# Altium PCB opo_v3.0.PcbDoc (part 2 of 2)
Units mil, origin at the board's own origin, x right, y up, seen from the top; angles counter-clockwise.
Board outline 2047.24 x 1889.76 mil, 2 copper layers (Top Layer, Bottom Layer), stack 61.4 mil thick; 103 components, 79 nets, 432 pads, 140 vias.
Unrouted connection lines stored in the file: 108.
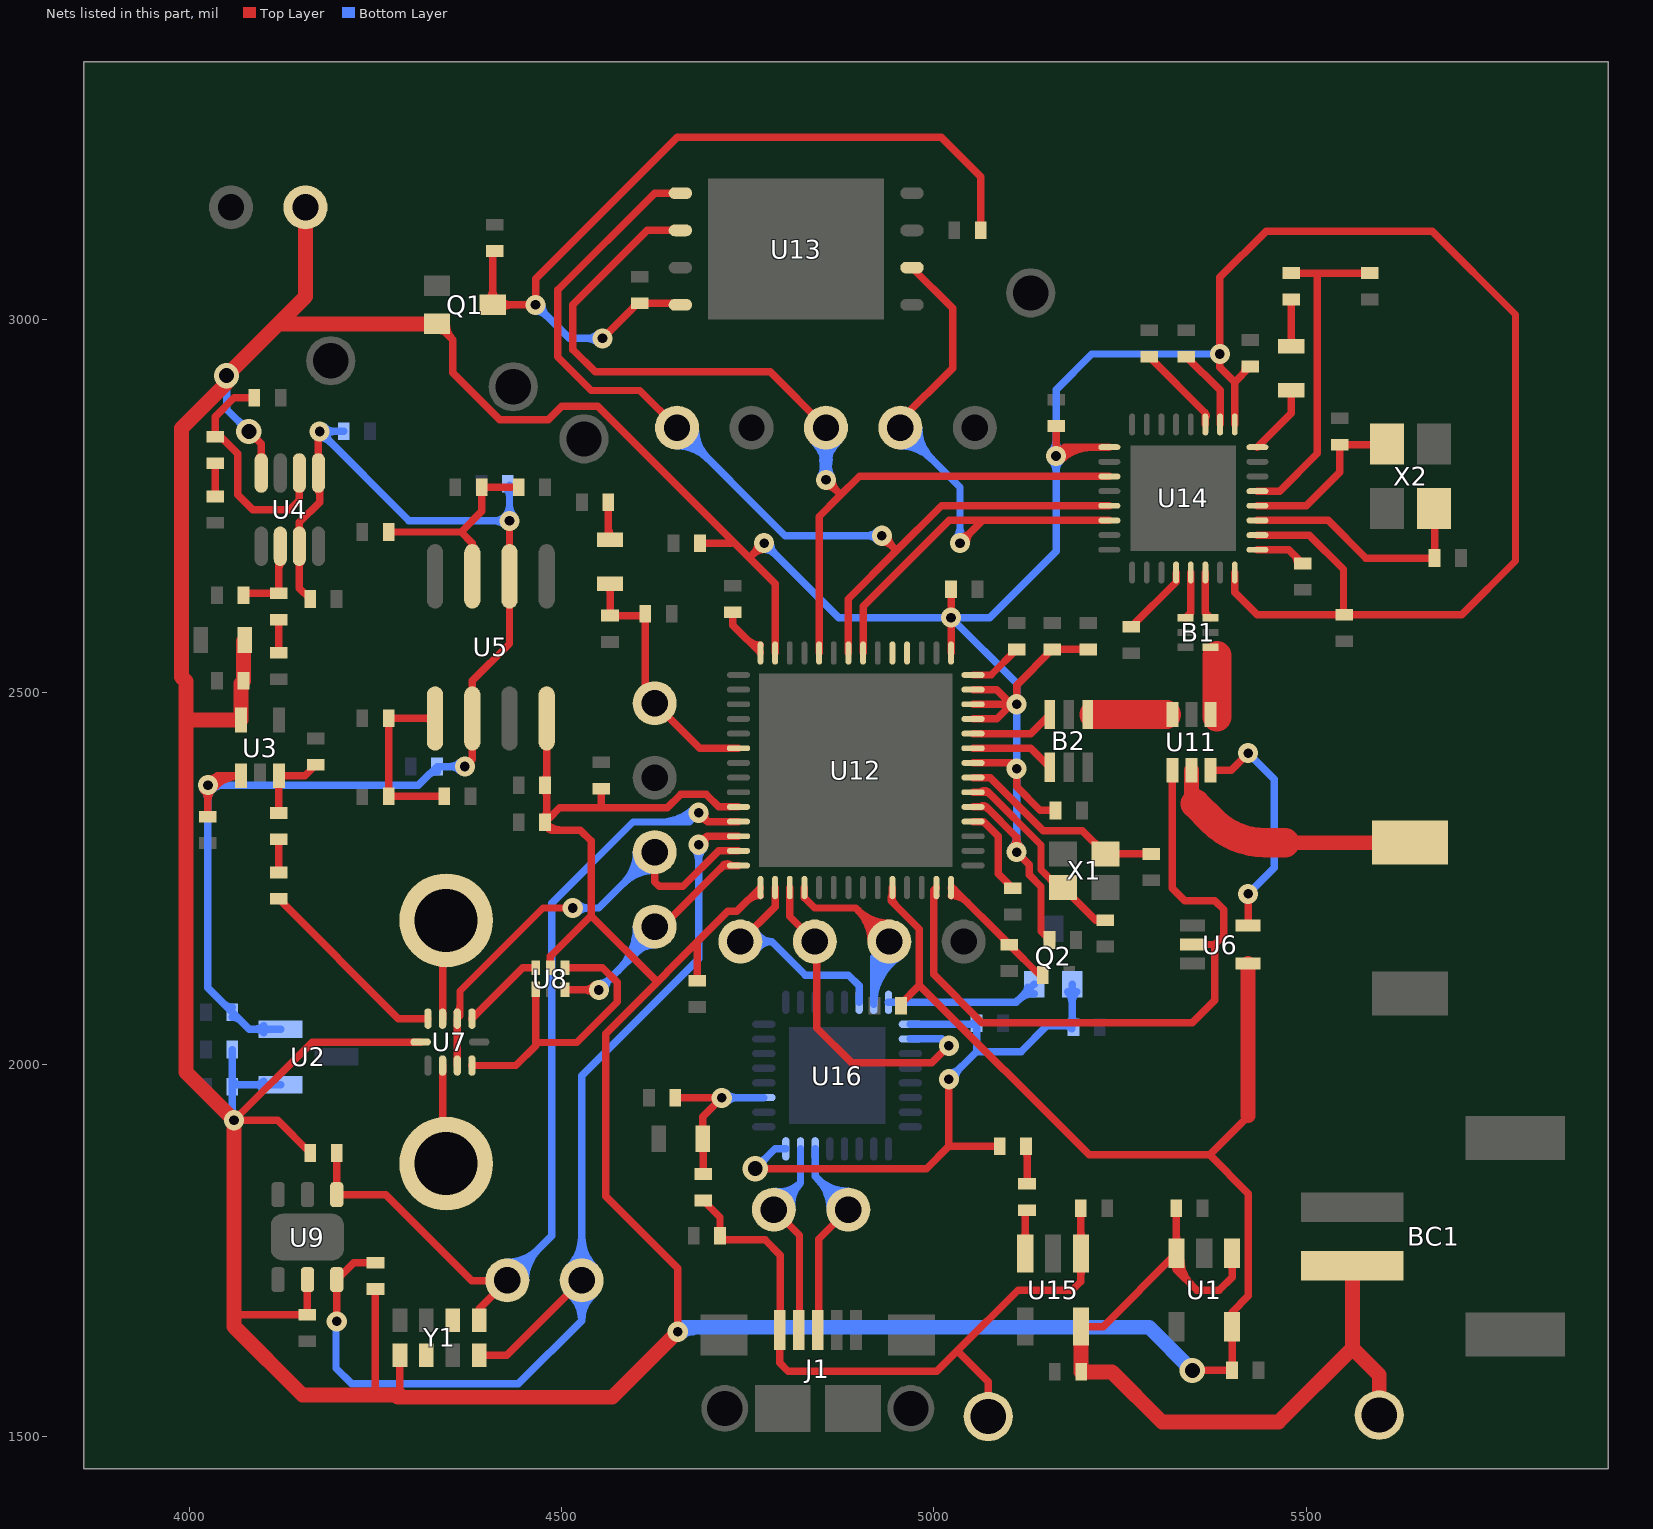
[diagram p2: the nets of this part, all layers, seen from the top]

## Via types
v1: diameter 27, hole 13, Top Layer to Bottom Layer, tented both sides, 110 vias
v2: diameter 34, hole 20, Top Layer to Bottom Layer, tented both sides, 26 vias
v3: diameter 29, hole 15, Top Layer to Bottom Layer, tented both sides, 3 vias
v4: diameter 30, hole 15.75, Top Layer to Bottom Layer, tented both sides, 1 vias

## Nets (pads, with @x,y where several pads share a name; then routed paths per layer and width w, separated by ;. In a path a pad name is that pad's centre, name@x,y a point inside that pad or via, vN(x,y) a via of type N, cw(c..) or ccw(c..) an arc to the next point about the centre after c; other vN are vias at no path point) (continued)
I2C_SCL: pad.1@4527,1710 R16.2 U9.6 U12.12 Y1.8 | length 1825
  Top Layer w10: v1(4198,1655) U9.6@4198,1710.91 4220.8,1733.72 R16.2@4250,1733.72 ; Y1.8@4389.15,1609.38 4426.38,1609.38 pad.1@4527,1710 ; v1(4684,2295) 4695.42,2306.42 ; v1@4685.55,2303.36 ccw(c4687.58,2314.26) 4695.42,2306.42 ; v1@4692.36,2296.55 cw(c4703.26,2298.58) 4695.42,2306.42 ; U12.12@4737.52,2306.42 4695.42,2306.42
  Bottom Layer w10: v1@4197,1654 4197,1592 4218,1571 4442,1571 4527,1656 ; pad.1@4509.66,1727.34 ccw(c4467.79,1769.21) 4527,1769.21 ccw(c4586.21,1769.21) pad.1@4544.34,1727.34 ; pad.1@4510.86,1691.53 cw(c4479.82,1656) 4527,1656 ; pad.1@4516.73,1720.27 ccw(c4491.93,1745.07) 4527,1745.07 ccw(c4562.07,1745.07) pad.1@4537.27,1720.27 ; pad.1@4517.44,1699.06 cw(c4499.06,1678.02) 4527,1678.02 cw(c4554.94,1678.02) pad.1@4536.56,1699.06 ; pad.1@4543.14,1691.53 ccw(c4574.18,1656) 4527,1656 ; v1@4677.99,2288.99 cw(c4663.48,2274.48) 4684,2274.48 cw(c4704.52,2274.48) v1@4690.01,2288.99 ; v1(4684,2295) 4684,2142 4527,1985 pad.1@4527,1710 4527,1656
I2C_SDA: pad.0@4427,1710 R15.2 U9.1 U12.11 Y1.1 | length 1490
  Top Layer w10: R15.2@4198,1881 U9.1@4198,1825.09 4263.91,1825.09 4379.53,1709.47 4427,1709.47 4389.15,1671.62 Y1.1@4389.15,1656.62 ; v1(4684,2338) 4695.9,2326.1 ; v1@4685.27,2329.6 cw(c4687.13,2317.33) 4695.9,2326.1 ; v1@4692.4,2336.73 ccw(c4704.67,2334.87) 4695.9,2326.1 ; U12.11@4737.52,2326.1 4695.9,2326.1
  Bottom Layer w10: pad.0@4427,1710 4487,1770 4487,2216.65 4595.88,2325.53 4671.53,2325.53 v1(4684,2338) ; pad.0@4427,1724.53 ccw(c4427,1759.6) 4451.8,1734.8 ccw(c4476.6,1710) pad.0@4441.53,1710 ; pad.0@4427,1734.53 ccw(c4427,1793.74) 4468.87,1751.87 ccw(c4510.74,1710) pad.0@4451.53,1710 ; 4633.37,2325.53 ccw(c4633.37,2388.63) v1@4677.99,2344.01 ; 4657.51,2325.53 ccw(c4657.51,2364.49) v1@4685.06,2336.94
INTEGRATOR: C17.1 D1.2 pad.11 R11.1 U12.6 | length 378.8
  Top Layer w10: D1.2@4561.58,2642.05 cw(c4553.31,2633.78) 4565,2633.78 cw(c4576.69,2633.78) D1.2@4568.42,2642.05 ; D1.2@4565,2645.47 R11.1@4565,2602.72 C17.1@4610,2602.72 ; 4601.35,2602.72 cw(c4601.35,2590.13) C17.1@4610.25,2599.03 ; C17.1@4612.28,2605 4612.28,2497.72 pad.11@4625,2485 4685.47,2424.53 U12.6@4737.52,2424.53
NetANT1_1: ANT1.1 U11.5 | length 352.3
  Top Layer w19.68: U11.5@5345.83,2395 5345.83,2362.3 ccw(c5363.22,2362.3) 5350.91,2350.01 ; 5471.31,2297.69 ANT1.1@5639.45,2297.69
  Top Layer w39.37: 5350.92,2350 5373.94,2326.98 ccw(c5444.65,2397.69) 5444.65,2297.69 5471.31,2297.69
NetB1_1: B1.1 U11.1 | length 82
  Top Layer w39.37: 5380,2467 5380,2549
NetB1_3: B1.3 U14.22 | length 63.8
  Top Layer w10: U14.22@5364.53,2660.59 5364.53,2606.57 B1.3@5371.42,2599.68
NetB1_4: B1.4 U14.21 | length 63.8
  Top Layer w10: B1.4@5337.95,2599.68 5344.84,2606.57 U14.21@5344.84,2660.59
NetB2_1: B2.1 U11.3 | length 97
  Top Layer w39.37: 5215,2469.8 5312,2469.8
NetB2_3: B2.3 U12.38 | length 113.5
  Top Layer w10: U12.38@5052.48,2444.21 5129.82,2444.21 B2.3@5155.41,2469.8
NetB2_4: B2.4 U12.37 | length 113.5
  Top Layer w10: U12.37@5052.48,2424.53 5129.82,2424.53 B2.4@5155.41,2398.94
NetC6_2: C6.2 R2.1 | length 44.6
  Top Layer w10: C6.2@4035,2762.72 R2.1@4035,2807.28
NetC7_1: C7.1 U7.4 | length 267.1
  Top Layer w10: C7.1@4120,2222.28 4280.79,2061.5 U7.4@4320.47,2061.5
NetC7_2: C7.2 R4.1 | length 44.6
  Top Layer w10: C7.2@4120,2257.72 R4.1@4120,2302.28
NetC8_2: C8.2 R6.1 | length 44.6
  Top Layer w10: C8.2@4120,2552.72 R6.1@4120,2597.28
NetC22_1: C22.1 U12.56 | length 86.9
  Top Layer w10: C22.1@4730,2602.28 4730,2589.53 U12.56@4767.05,2552.48 ; 4748.7,2570.83 ccw(c4767.05,2589.18) U12.56@4767.05,2563.23 ; U12.56@4765.77,2553.76 ccw(c4767.05,2555.03) U12.56@4767.05,2553.23
NetC23_1: C23.1 U12.35 X1.1 | length 282
  Top Layer w10: U12.35@5052.48,2385.16 5075.84,2385.16 5147,2314 5199.18,2314 X1.1@5230.54,2282.64 C23.1@5292,2282.64
NetC24_1: C24.1 U12.32 | length 120.1
  Top Layer w10: U12.32@5052.48,2326.1 5067.02,2326.1 5086.5,2306.62 5086.5,2256.22 C24.1@5106,2236.72
NetC25_2: C25.2 U12.34 X1.3 | length 292.5
  Top Layer w10: U12.34@5052.48,2365.47 5072.9,2365.47 ; U12.34@5063.7,2366.35 cw(c5067.76,2360.34) 5072.9,2365.47 ; U12.34@5064.29,2366.54 cw(c5064.29,2348.32) 5077.17,2361.2 ; C25.2@5230,2193.72 5217.1,2193.72 X1.3@5173.46,2237.36 5167.74,2237.36 5143.76,2261.35 5143.76,2294.62 5072.9,2365.47
NetC26_1: C26.1 R18.1 U12.28 | length 201.1
  Top Layer w10: U12.28@5022.95,2226.77 cw(c5022.95,2196.38) 5044.45,2217.87 ; U12.28@5022.95,2236.77 cw(c5022.95,2230.52) 5027.37,2234.94 ; U12.28@5022.95,2237.52 5024.79,2237.52 5101,2161.31 R18.1@5101,2160.72 5141.72,2120 C26.1@5146.28,2120
NetC27_1: C27.1 U14.28 X2.1 | length 230.4
  Top Layer w10: U14.28@5434.41,2750.16 5500.16,2750.16 5545,2795 C27.1@5545,2832.28 5607.48,2832.28 X2.1@5608.5,2833.31
NetC28_1: C28.1 L1.1 U14.29 | length 448.9
  Top Layer w10: U14.29@5434.41,2769.84 5464.49,2769.84 5515,2820.35 5515,3062.72 ; L1.1@5480,3062.72 5515,3062.72 ; C28.1@5585,3062.72 5515,3062.72
NetC29_2: C29.2 U14.27 X2.3 | length 325.8
  Top Layer w10: U14.27@5434.41,2730.47 5529.53,2730.47 5580,2680 C29.2@5672.28,2680 5672.28,2745.91 X2.3@5671.5,2746.69
NetC32_1: C32.1 U14.2 | length 109.6
  Top Layer w10: C32.1@5339,2950.28 5384.21,2905.07 U14.2@5384.21,2859.41
NetC33_1: C33.1 U14.3 | length 128.7
  Top Layer w10: C33.1@5289,2950.28 5364.53,2874.76 U14.3@5364.53,2859.41 ; 5363.15,2876.14 cw(c5357.24,2870.24) U14.3@5365.59,2870.24
NetC34_1: C34.1 U14.20 | length 97.8
  Top Layer w10: C34.1@5265,2587.72 5325.16,2647.87 U14.20@5325.16,2660.59
NetD1_1: D1.1 R9.2 | length 63.5
  Top Layer w10: D1.1@4562.72,2706.81 R9.2@4562.72,2755 ; 4562.72,2721.73 ccw(c4582.2,2721.73) D1.1@4568.42,2707.95
NetD2_2: D2.2 R20.1 | length 57.9
  Top Layer w10: D2.2@5121.68,1884.03 cw(c5113.68,1876.03) 5125,1876.03 ; R20.1@5125,1839.72 D2.2@5125,1888.72
NetJ1_2: J1.2 pad.7@4785,1805 U16.15 | length 364.5
  Top Layer w10: pad.7@4785,1805 4819.41,1770.59 J1.2@4819.41,1666
  Bottom Layer w10: pad.7@4785,1805 4820.79,1840.79 ; pad.7@4786.7,1819.43 ccw(c4789.46,1842.93) 4806.2,1826.2 ccw(c4822.93,1809.46) pad.7@4799.43,1806.7 ; pad.7@4787.87,1829.36 ccw(c4792.54,1869.03) 4820.79,1840.79 ; pad.7@4809.36,1807.87 cw(c4849.03,1812.54) 4820.79,1840.79 ; U16.15@4820.79,1886.57 4820.79,1840.79
NetJ1_3: J1.3 pad.6@4885,1805 U16.14 | length 403.7
  Top Layer w10: J1.3@4845,1666 4845,1765 pad.6@4885,1805
  Bottom Layer w10: U16.14@4840.47,1886.57 4840.47,1849.53 pad.6@4885,1805 ; pad.6@4860.47,1805 ccw(c4801.26,1805) 4843.13,1846.87 ccw(c4885,1888.74) pad.6@4885,1829.53 ; pad.6@4870.47,1805 ccw(c4835.4,1805) 4860.2,1829.8 ccw(c4885,1854.6) pad.6@4885,1819.53
NetL1_2: L1.2 L2.1 | length 81.1
  Top Layer w10: L2.1@5476.58,2967.95 ccw(c5468.31,2976.22) 5480,2976.22 ccw(c5491.69,2976.22) L2.1@5483.42,2967.95 ; L2.1@5480,2964.53 L1.2@5480,3027.28
NetL2_2: L2.2 U14.32 | length 83.8
  Top Layer w10: U14.32@5434.41,2828.9 5480,2874.49 5480,2893.78
NetR1_1: R1.1 R4.2 U3.3 | length 112.7
  Top Layer w10: R4.2@4120,2337.72 4120,2387.01 U3.3@4120.59,2387.6 4155.31,2387.6 R1.1@4170,2402.28 ; 4120,2370.38 cw(c4128.95,2370.38) U3.3@4122.62,2376.71
NetR2_2: R2.2 R5.2 U4.6 | length 324.5
  Top Layer w10: R2.2@4035,2842.72 4035,2870 4060,2895 R5.2@4087.28,2895 ; R2.2@4042.28,2842.72 4065,2820 4065,2765 4085,2745 4135,2745 4147.8,2757.8 U4.6@4147.8,2794.21 ; U4.6@4145.07,2773.77 cw(c4138.48,2767.18) 4147.8,2767.18 cw(c4157.11,2767.18) U4.6@4150.52,2773.77
NetR3_2: R3.2 R6.2 U4.2 | length 134.3
  Top Layer w10: R3.2@4072.72,2630 4075.43,2632.72 R6.2@4120,2632.72 4120,2693.58 U4.2@4122.2,2695.79 ; R3.2@4074.75,2635.97 ccw(c4082.6,2643.82) 4082.6,2632.72 ; 4120,2663.43 cw(c4136.84,2663.43) U4.2@4124.93,2675.34
NetR7_1: R7.1 R8.2 R10.1 U5.3 | length 301.3
  Top Layer w10: R8.2@4267.72,2715 4365,2715 ; U5.3@4376.38,2692.52 ccw(c4370.46,2700) 4380,2700 ; U5.3@4380,2655.47 4380,2700 ; U5.3@4383.62,2692.52 cw(c4389.54,2700) 4380,2700 ; R7.1@4442.28,2775 R10.1@4392.72,2775 4392.72,2742.72 4365,2715 ; 4365,2715 4380,2700
NetR12_2: R12.2 R13.1 R14.1 U5.5 | length 263.5
  Top Layer w10: 4314.79,2465 cw(c4314.79,2449.32) U5.5@4325.88,2460.41 ; 4317.07,2465 ccw(c4317.07,2477.45) U5.5@4325.88,2468.65 ; U5.5@4329.53,2465 R12.2@4267.72,2465 R13.1@4267.72,2360 R14.1@4342.28,2360
NetR17_1: R17.1 U12.42 | length 72.7
  Top Layer w10: U12.42@5052.48,2522.95 5076.67,2522.95 R17.1@5111,2557.28
NetR19_1: R19.1 U14.25 | length 81.1
  Top Layer w10: U14.25@5434.41,2691.1 5476.61,2691.1 R19.1@5495,2672.72 ; 5483.37,2684.34 cw(c5471.75,2672.72) R19.1@5488.19,2672.72
NetR20_2: R20.2 U15.3 | length 87.3
  Top Layer w10: U15.3@5118.48,1765.1 ccw(c5108.53,1775.04) 5122.6,1775.04 ccw(c5136.67,1775.04) U15.3@5126.72,1765.1 ; R20.2@5119.03,1802.25 cw(c5110.42,1793.64) 5122.6,1793.64 ; U15.3@5122.6,1746.21 R20.2@5122.6,1801.88
NetU7_3: U7.3 UT1.2 | length 127
  Top Layer w10: U7.3@4340.16,2061.5 UT1.2@4340.16,2188.54
NetU7_7: U7.7 UT1.1 | length 127
  Top Layer w10: UT1.1@4340.16,1871.46 U7.7@4340.16,1998.5
NetU12_46: U12.46
NetU12_47: U12.47
PWM: pad.9 U8.3 U12.14 | length 530.7
  Top Layer w10: U8.3@4504.69,2100.24 v1@4549.76,2100.24 ; 4528.91,2100.24 cw(c4528.91,2078.91) v1@4543.99,2093.99 ; 4530.05,2100.24 ccw(c4530.05,2119.95) v1@4543.99,2106.01 ; pad.9@4625,2189.53 pad.9@4625,2185 4635,2185 4717.05,2267.05 ; 4712.74,2262.74 cw(c4725.71,2249.77) U12.14@4725.71,2268.11 ; U12.14@4726.31,2267.93 ccw(c4722.21,2261.89) 4717.05,2267.05 ; U12.14@4737.52,2267.05 4717.05,2267.05
  Bottom Layer w10: v1(4550,2100) pad.9@4625,2175 ; v1@4550,2108.5 ccw(c4550,2129.02) 4564.51,2114.51 ccw(c4579.02,2100) v1@4558.5,2100 ; 4576.06,2126.06 ccw(c4517.12,2185) pad.9@4600.47,2185 ; 4593.13,2143.13 ccw(c4551.26,2185) pad.9@4610.47,2185 ; 4600.2,2150.2 cw(c4625,2125.4) pad.9@4625,2160.47
RF_SWITCH_1: U6.5 U11.6 | length 320.5
  Top Layer w10: U11.6@5371.42,2395 5399,2395 v1(5422,2418) ; U6.5@5422,2186.59 v1(5422,2229)
  Bottom Layer w10: v1(5422,2229) 5457,2264 5457,2383 v1(5422,2418)
RF_SWITCH_2: U6.2 U11.4 U12.27 | length 938.9
  Top Layer w10: 4999.47,2219.11 cw(c5009.86,2219.11) U12.27@5002.52,2226.46 ; U12.27@5003.27,2237.52 4999.47,2233.72 4999.47,2120.88 5064.35,2056 5347,2056 5377,2086 5377,2161 ; U11.4@5320.24,2395 5320.24,2236.76 5337,2220 5377,2220 5389,2208 5389,2173 5377,2161 ; U6.2@5347.2,2161 5377,2161
ROM_CONTROL: pad.5@4940,2165 U12.18 U16.31 | length 619.1
  Top Layer w10: U12.18@4826.1,2237.52 4826.1,2223.9 4840,2210 4895,2210 pad.5@4940,2165 ; pad.5@4915.47,2165 ccw(c4856.26,2165) 4898.13,2206.87 ccw(c4940,2248.74) pad.5@4940,2189.53 ; pad.5@4925.47,2165 ccw(c4890.4,2165) 4915.2,2189.8 ccw(c4940,2214.6) pad.5@4940,2179.53
  Bottom Layer w10: U16.31@4919.21,2080.82 cw(c4995.53,2080.82) pad.5@4953.51,2144.53 ; U16.31@4919.21,2083.43 4919.21,2144.21 pad.5@4940,2165 ; 4919.21,2099.4 cw(c4983.27,2099.4) pad.5@4948,2152.87 ; 4919.21,2117.97 cw(c4971.02,2117.97) pad.5@4942.49,2161.22 ; 4919.21,2136.55 cw(c4958.77,2136.55) pad.5@4936.99,2169.57
ROM_RESET: Q2.2 U16.32 | length 238.8
  Bottom Layer w10: U16.32@4938.9,2083.43 5110.24,2083.43 Q2.2@5134.41,2107.6 ; 5112.7,2085.89 cw(c5134.41,2064.18) Q2.2@5134.41,2094.88 ; Q2.2@5122.21,2095.39 ccw(c5113.94,2103.66) Q2.2@5125.63,2103.66
ROM_UART_RXD: pad.3 U12.16 U16.30 | length 348.2
  Top Layer w10: pad.3@4740,2165 4786.73,2211.73 U12.16@4786.73,2237.52
  Bottom Layer w10: pad.3@4740,2165 4782,2165 ; pad.3@4761.36,2152.95 cw(c4782,2141.31) 4782,2165 ; pad.3@4761.36,2177.05 ccw(c4782,2188.69) 4782,2165 ; U16.30@4899.53,2083.43 4899.53,2105.47 4885,2120 4827,2120 4782,2165
ROM_UART_TXD: pad.4@4840,2165 U12.17 U16.2 | length 465.2
  Top Layer w10: U12.17@4806.42,2237.52 4806.42,2198.58 pad.4@4840,2165 4842.83,2162.17 4842.83,2048.94 4889.77,2002 4997,2002 v1(5020,2025)
  Bottom Layer w10: U16.2@4968.43,2034.21 5010.79,2034.21 v1(5020,2025)
RTC_CLKOUT: Y1.2
RTC_INT: Y1.6
SPI_MISO: pad.7@4955,2855 U12.49 U13.2 U14.14 | length 1151.2
  Top Layer w10: U12.49@4905,2552.64 4905,2615 5020.47,2730.47 5065.47,2730.47 ; pad.7@4955,2855 4955,2865 5025,2935 5025,3015.51 U13.2@4970.51,3070 ; v1(5035,2700) 5065.47,2730.47 ; v1@5035,2708.5 ccw(c5035,2729.02) 5049.51,2714.51 ccw(c5064.02,2700) v1@5043.5,2700 ; U14.14@5235.59,2730.47 5065.47,2730.47
  Bottom Layer w10: pad.7@4955,2830.47 cw(c4955,2771.26) 4996.87,2813.13 cw(c5038.74,2855) pad.7@4979.53,2855 ; pad.7@4955,2840.47 cw(c4955,2805.4) 4979.8,2830.2 cw(c5004.6,2855) pad.7@4969.53,2855 ; pad.7@4955,2855 5035,2775 v1(5035,2700) ; v1@5028.99,2706.01 ccw(c5014.48,2720.52) 5035,2720.52 ccw(c5055.52,2720.52) v1@5041.01,2706.01
SPI_MOSI: pad.4@4655,2855 U12.50 U13.5 U14.13 | length 1559.8
  Top Layer w10: pad.4@4655,2855 4605,2905 4540,2905 4495,2950 4495,3040 4625,3170 U13.5@4659.49,3170 ; U12.50@4885,2552.64 4885,2625 4947.58,2687.58 ; v1@4930,2701.5 cw(c4930,2680.98) 4944.51,2695.49 cw(c4959.02,2710) v1@4938.5,2710 ; v1(4930,2710) 4947.58,2692.42 4947.58,2687.58 ; U14.13@5235.59,2750.16 5010.16,2750.16 4947.58,2687.58
  Bottom Layer w10: pad.4@4655,2830.47 cw(c4655,2771.26) 4696.87,2813.13 cw(c4738.74,2855) pad.4@4679.53,2855 ; pad.4@4655,2840.47 cw(c4655,2805.4) 4679.8,2830.2 cw(c4704.6,2855) pad.4@4669.53,2855 ; pad.4@4655,2855 4800,2710 v1(4930,2710) ; v1@4923.99,2703.99 ccw(c4909.48,2689.48) 4909.48,2710 ccw(c4909.48,2730.52) v1@4923.99,2716.01
SPI_SCK: pad.6@4855,2855 U12.52 U13.6 U14.11 | length 1601.7
  Top Layer w10: U13.6@4659.49,3120 4615,3120 4515,3020 4515,2960 4545,2930 4780,2930 pad.6@4855,2855 ; U12.52@4845.79,2552.48 4845.79,2735.79 4872.89,2762.89 ; v1@4855,2776.5 cw(c4855,2755.98) 4869.51,2770.49 cw(c4884.02,2785) v1@4863.5,2785 ; v1(4855,2785) 4872.89,2767.11 4872.89,2762.89 ; U14.11@5235.59,2789.53 5235.12,2790 4900,2790 4872.89,2762.89
  Bottom Layer w10: pad.6@4837.66,2837.66 cw(c4795.79,2795.79) 4855,2795.79 cw(c4914.21,2795.79) pad.6@4872.34,2837.66 ; pad.6@4844.73,2844.73 cw(c4819.93,2819.93) 4855,2819.93 cw(c4890.07,2819.93) pad.6@4865.27,2844.73 ; v1@4847.64,2789.25 ccw(c4821.61,2804.28) 4850.64,2812.05 ; v1@4848.99,2791.01 ccw(c4834.48,2805.52) 4855,2805.52 ccw(c4875.52,2805.52) v1@4861.01,2791.01 ; v1@4850.75,2792.36 ccw(c4845.26,2801.88) 4855.87,2799.03 ; 4854.13,2799.03 ccw(c4864.74,2801.88) v1@4859.25,2792.36 ; v1(4855,2785) pad.6@4855,2855 ; 4859.36,2812.05 ccw(c4888.39,2804.28) v1@4862.36,2789.25
TX_1: U7.1 U8.6 | length 114.1
  Top Layer w10: U7.1@4379.53,2061.5 4447.8,2129.76 U8.6@4465.31,2129.76
TX_2: U7.9 U8.1 U8.4 | length 404
  Top Layer w10: U7.9@4379.53,1998.5 4438.5,1998.5 4465,2025 U8.1@4465,2100.71 ; 4469.41,2029.41 4520.06,2029.41 4574.5,2083.85 4574.5,2110.15 4554.88,2129.76 U8.4@4504.69,2129.76
TXRX_SELECT: pad.8@4625,2285 U7.2 U7.8 U12.13 | length 805.1
  Top Layer w10: U7.8@4359.84,1998.5 U7.2@4359.84,2061.5 4363.53,2065.18 4363.53,2098.53 4475,2210 v1(4515,2210) ; U7.2@4359.9,2070.3 ccw(c4351.14,2079.06) 4363.53,2079.06 ; pad.8@4625,2285 4625,2245 4631,2239 4663,2239 4710.73,2286.73 U12.13@4737.52,2286.73
  Bottom Layer w10: v1(4515,2210) 4550,2210 pad.8@4625,2285 ; v1@4521.01,2203.99 cw(c4535.52,2189.48) 4535.52,2210 cw(c4535.52,2230.52) v1@4521.01,2216.01 ; pad.8@4600.47,2285 cw(c4541.26,2285) 4583.13,2243.13 cw(c4625,2201.26) pad.8@4625,2260.47 ; pad.8@4610.47,2285 cw(c4575.4,2285) 4600.2,2260.2 cw(c4625,2235.4) pad.8@4625,2270.47
VBAT: BC1.1 C1.1 C37.1 pad.1@5598,1529 U1.1 U1.3 U15.5 | length 1201.3
  Top Layer w10: U15.5@5197.4,1647.79 5227.17,1647.79 U1.3@5325.6,1746.21 ; U1.3@5321.43,1737.35 ccw(c5342.62,1737.35) 5327.63,1722.37 ; U1.3@5321.48,1759.19 ccw(c5311.53,1769.14) 5325.6,1769.14 ccw(c5339.67,1769.14) U1.3@5329.72,1759.19 ; U1.3@5321.73,1732.99 cw(c5314.12,1724.4) 5325.6,1724.4 ; C1.1@5325.6,1806.68 U1.3@5325.6,1746.21 ; U1.3@5329.46,1732.99 ccw(c5337.08,1724.4) 5325.6,1724.4 ; U1.3@5331.43,1737.35 ccw(c5376.76,1737.35) 5344.7,1705.3 ; U1.1@5396.28,1733.23 cw(c5386.33,1723.29) 5400.4,1723.29 cw(c5414.47,1723.29) U1.1@5404.52,1733.23 ; U1.1@5400.4,1746.21 5400.4,1714.4 5383,1697 5353,1697 5325.6,1724.4 ; 5325.6,1724.4 U1.3@5325.6,1746.21
  Top Layer w20: C37.1@5197.4,1587.31 U15.5@5197.4,1647.79 ; C37.1@5197.72,1587 5239,1587 5306,1520 5463,1520 5562,1619 ; BC1.1@5562,1729.63 5562,1619 ; pad.1@5598,1529 5598,1583 5562,1619
VBUS: C36.1 C40.1 FB1.2 J1.1 pad.0@5073,1527 U15.1 | length 999.6
  Top Layer w10: FB1.2@4690,1817.28 4712.72,1794.57 C40.1@4712.72,1770 4718.24,1764.47 4773.17,1764.47 4793.82,1743.82 J1.1@4793.82,1654.18 ; C40.1@4714.75,1768.1 ccw(c4723.49,1776.84) 4723.49,1764.47 ; J1.1@4792.82,1643.32 4792.82,1599.18 4804,1588 5004,1588 5031.5,1615.5 ; pad.0@5073,1527 5073,1574 5031.5,1615.5 ; U15.1@5193.28,1727.33 cw(c5183.33,1717.38) 5197.4,1717.38 cw(c5211.47,1717.38) U15.1@5201.52,1727.33 ; U15.1@5193.28,1765.1 ccw(c5183.33,1775.04) 5197.4,1775.04 ccw(c5211.47,1775.04) U15.1@5201.52,1765.1 ; C36.1@5197.4,1806.88 U15.1@5197.4,1746.21 5197.4,1708.4 5186,1697 5113,1697 5031.5,1615.5
VCC3.3: C2.1 C3.1 C4.1 C10.1 C11.1 C12.1 C13.1 C19.1 C20.1 C21.1 C30.1 C31.1 C35.1 C43.1 C44.1 C45.1 C46.1 C47.1 C48.1 C49.1 pad.1@4156,3151 Q1.2 R15.1 R16.1 U1.5 U2.1 U3.5 U4.8 U5.8 U6.4 U7.5 U8.5 U9.5 U12.10 U12.15 U12.24 U12.33 U12.36 U12.39 U12.40 U12.41 U12.43 U12.55 U14.1 U14.9 U14.24 U14.26 Y1.5 | length 12703.8
  Top Layer w10: 4060,1666 4062.28,1663.72 C21.1@4158.63,1663.72 U9.5@4158.63,1710.91 ; 4069.41,2496.14 cw(c4087.64,2496.14) C10.1@4074.75,2509.03 ; 4072.72,2546.06 cw(c4090.59,2546.06) C11.1@4077.95,2558.7 ; v2(4080,2850) 4096.61,2833.39 U4.8@4096.61,2794.21 ; U4.8@4093.89,2814.66 ccw(c4087.3,2821.24) 4096.61,2821.24 ccw(c4105.93,2821.24) U4.8@4099.34,2814.66 ; R15.1@4162.57,1881 4118.57,1925 v1(4060,1925) 4165,2030 U7.5@4310.63,2030 ; 4250,1555.85 R16.1@4250,1698.28 ; 4282.85,1555.85 Y1.5@4282.85,1609.38 ; Q1.2@4322.45,2988.2 ccw(c4307.47,2973.21) 4307.47,2994.41 ccw(c4307.47,3015.61) Q1.2@4322.45,3000.62 ; Q1.2@4332.6,2994.41 4354,2973.01 ; Q1.2@4336.54,2985.63 cw(c4336.54,2973.94) Q1.2@4344.8,2982.21 ; Q1.2@4345.31,2994.31 ccw(c4374.97,2993.98) 4354,2973.01 ; C13.1@4475.68,2330.97 ccw(c4465.27,2341.39) 4480,2341.39 ; C12.1@4475.68,2369.03 cw(c4465.27,2358.61) 4480,2358.61 ; C12.1@4475.68,2380.97 ccw(c4465.27,2391.39) 4480,2391.39 ; C13.1@4477.72,2331.81 ccw(c4477.72,2348.25) 4489.34,2336.63 ; C13.1@4477.98,2318.2 cw(c4479.15,2305.44) 4488.22,2314.5 ; C13.1@4479.75,2323.1 ccw(c4500.5,2343.85) 4500.5,2314.5 ; U5.8@4480,2464.53 C13.1@4480,2327.28 ; C13.1@4480.57,2321.37 ccw(c4488.22,2322.19) 4488.22,2314.5 ; U8.5@4485,2129.76 4485,2145.35 4539.5,2199.85 ; 4553,2345.47 C20.1@4553,2370.28 ; 4626.19,2113.16 4539.5,2199.85 ; v1(4656,1641) 4656,1726 4559,1823 4559,2041.31 4723.21,2205.53 4735.06,2205.53 U12.15@4767.05,2237.52 ; C43.1@4682,2112.43 4682,2162.31 ; C45.1@4685.72,2700 4727.67,2700 ; U12.10@4737.52,2345.79 4710.86,2345.79 4694.15,2362.5 4659.81,2362.5 4641.79,2344.47 4497.19,2344.47 C13.1@4480,2327.28 ; 4748.7,2219.17 cw(c4767.05,2200.82) U12.15@4767.05,2226.77 ; 4753.66,2681.66 v1(4772,2700) ; v1@4763.5,2700 cw(c4742.98,2700) 4757.49,2685.49 cw(c4772,2670.98) v1@4772,2691.5 ; U12.15@4765.77,2236.24 cw(c4767.05,2234.97) U12.15@4767.05,2236.77 ; U12.55@4786.73,2552.48 4786.73,2645.59 4548.25,2884.07 4500.16,2884.07 4482.02,2865.93 4416.75,2865.93 4354,2928.67 4354,2973.01 ; U12.24@4943.15,2225.71 ccw(c4958.95,2225.71) 4947.78,2214.54 ; U12.24@4943.32,2226.28 ccw(c4948.86,2222.75) 4944.21,2218.1 ; U12.24@4944.21,2237.52 4944.21,2218.1 ; C44.1@4955.72,2079 4955.72,2081.66 4980.53,2106.47 ; U12.43@5022.95,2552.48 v1(5022.95,2600) C47.1@5022.95,2638 ; U12.33@5052.48,2345.79 5069.96,2345.79 ; U12.36@5052.48,2404.84 5103.16,2404.84 v1(5111,2397) 5111,2372.63 5142.63,2341 C46.1@5163.28,2341 ; U12.39@5052.48,2463.9 5084.31,2463.9 v1@5104,2483.58 ; U12.40@5052.48,2483.58 v1@5104,2483.58 ; U12.41@5052.48,2503.27 5084.31,2503.27 v1@5104,2483.58 ; U12.33@5063.8,2346.73 cw(c5066.24,2342.07) 5069.96,2345.79 ; U12.33@5064.29,2346.85 cw(c5064.29,2335.74) 5072.15,2343.6 ; v1@5105.16,2291.17 ccw(c5092.32,2304.74) 5111,2304.74 ; v1@5116.84,2291.17 cw(c5129.68,2304.74) 5111,2304.74 ; C19.1@5155.28,2167 5143.76,2178.53 5143.76,2238.72 5127.76,2254.72 5127.76,2268.24 v1(5111,2285) 5111,2304.75 ; v1@5162.94,2818.06 cw(c5189.1,2791.9) 5189.1,2828.9 ; C35.1@5164,2857.28 v1(5164,2817) 5175.9,2828.9 ; v1@5165.27,2825.4 ccw(c5167.13,2837.67) 5175.9,2828.9 ; v1@5170.01,2810.99 cw(c5213.24,2767.76) 5213.24,2828.9 ; v1@5172.4,2818.27 cw(c5184.67,2820.13) 5175.9,2828.9 ; C48.1@5207,2557.28 C49.1@5159,2557.28 5111,2509.28 v1(5111,2483.58) v1@5104,2483.58 ; U14.9@5235.59,2828.9 5175.9,2828.9 ; v2(5347,1589) C2.1@5400.28,1589 ; U1.5@5396.28,1634.81 cw(c5386.33,1624.86) 5400.4,1624.86 cw(c5414.47,1624.86) U1.5@5404.52,1634.81 ; C2.1@5400.4,1587.31 U1.5@5400.4,1647.79 5400.4,1667.36 5422.23,1689.19 5422.23,1826.42 5370.15,1878.5 ; U14.24@5403.9,2660.59 5403.9,2633.82 5434,2603.72 C30.1@5551,2603.72 5708.72,2603.72 5781,2676 5781,3007 5669,3119 5446,3119 5384,3057 v1(5384,2954) 5384,2936.08 5403.9,2916.18 ; U14.1@5403.9,2859.41 5403.9,2916.18 ; 5413.37,2925.66 ccw(c5401.75,2937.28) C31.1@5418.19,2937.28 ; 5415.4,1923.75 5370.15,1878.5 ; C31.1@5425,2937.28 5403.9,2916.18 ; U14.26@5434.41,2710.79 5504.21,2710.79 5550,2665 C30.1@5550,2604.72 ; C13.1@4480,2327.28 C13.1@4477.72,2325 4488.22,2314.5 ; 4488.22,2314.5 4525.15,2314.5 4539.5,2300.15 4539.5,2199.85 ; 4944.21,2218.1 4980.53,2181.79 4980.53,2106.47 ; 4980.53,2106.47 5208.5,1878.5 5370.15,1878.5 ; 5069.96,2345.79 5111,2304.75
  Top Layer w20: 4000.1,2462.4 U3.5@4069.41,2462.4 C10.1@4069.41,2511.69 ; C10.1@4072.72,2515 C11.1@4072.72,2568.19 ; pad.1@4156,3151 4156,3031 4119.41,2994.41 ; 4280,1553 4568,1553 v1(4656,1641) ; 4282.85,1555.85 4250,1555.85 4152.15,1555.85 4060,1648 4060,1666 v1(4060,1925) 3995.5,1989.5 3995.5,2514.47 3989.63,2520.34 3989.63,2854.33 4050,2914.7 v2(4050,2925) 4119.41,2994.41 ; Q1.2@4332.6,2994.41 4119.41,2994.41 ; 5422,1931 U6.4@5422,2135.41
  Bottom Layer w10: v2(4050,2925) 4050,2880 v2(4080,2850) ; v1@4057.72,1927.28 C3.1@4057.72,1970 C4.1@4057.72,2020 ; C3.1@4059.75,1975.97 ccw(c4067.89,1984.11) 4067.89,1972.6 ; C3.1@4060.31,1972.6 U2.1@4122.6,1972.6 ; v2@4071.5,2850 ccw(c4050.98,2850) 4065.49,2864.51 ccw(c4080,2879.02) v2@4080,2858.5 ; U2.1@4100.07,1967.78 ccw(c4088.44,1956.16) 4088.44,1972.6 ccw(c4088.44,1989.04) U2.1@4100.07,1977.41 ; v1@4662.01,1634.99 cw(c4676.52,1620.48) 4676.52,1641 cw(c4676.52,1661.52) v1@4662.01,1647.01 ; v1@4772,2691.5 cw(c4772,2670.98) 4786.51,2685.49 cw(c4801.02,2700) v1@4780.5,2700 ; v1(4772,2700) 4872,2600 v1(5022.95,2600) ; v1@5104.99,2291.01 ccw(c5090.48,2305.52) 5111,2305.52 ccw(c5131.52,2305.52) v1@5117.01,2291.01 ; v1(5111,2285) v1@5111,2390 ; v1(5111,2397) v1(5111,2483.58) 5111,2511.95 v1(5022.95,2600) ; v1@5157.99,2810.99 cw(c5143.48,2796.48) 5164,2796.48 cw(c5184.52,2796.48) v1@5170.01,2810.99 ; v1@5157.99,2823.01 ccw(c5143.48,2837.52) 5164,2837.52 ccw(c5184.52,2837.52) v1@5170.01,2823.01 ; v1(5384,2954) 5212,2954 5164,2906 v1(5164,2817) 5164,2689 5075,2600 v1(5022.95,2600)
  Bottom Layer w20: v1(4656,1641) 4662,1647 5289,1647 v2(5347,1589)
VCC3.3-USB: C38.1 D2.1 Q2.1 R23.1 U16.1 U16.16 | length 987.2
  Top Layer w10: v2(4760,1860) 4990,1860 5020,1890 ; v1(5020,1980) 5020,1890 ; D2.1@5088.28,1890 5020,1890
  Bottom Layer w10: v2(4760,1860) 4786.57,1886.57 U16.16@4801.1,1886.57 ; v2@4760,1868.5 ccw(c4760,1889.02) 4774.51,1874.51 ccw(c4789.02,1860) v2@4768.5,1860 ; U16.1@4968.43,2053.9 5056.18,2053.9 C38.1@5057.28,2055 5057.28,2017.28 ; v1(5020,1980) 5057.28,2017.28 ; v1@5020,1988.5 ccw(c5020,2009.02) 5034.51,1994.51 ccw(c5049.02,1980) v1@5028.5,1980 ; 5047.68,2053.9 ccw(c5047.68,2064.6) C38.1@5055.25,2057.03 ; 5176.26,2051.69 cw(c5176.26,2038.97) R23.1@5185.25,2047.97 ; Q2.1@5179.38,2097.45 cw(c5164.4,2082.47) 5185.59,2082.47 cw(c5206.79,2082.47) Q2.1@5191.8,2097.45 ; 5185.59,2064.96 ccw(c5198.31,2064.96) R23.1@5189.32,2055.97 ; Q2.1@5185.59,2107.6 5185.59,2051.69 5151.69,2051.69 5117.28,2017.28 5057.28,2017.28
VCC_FLASH: C42.2 Q1.3 R21.1 R22.1 U13.8 | length 1311.1
  Top Layer w10: Q1.3@4401.19,3026.21 ccw(c4386.21,3041.2) 4407.4,3041.2 ccw(c4428.6,3041.2) Q1.3@4413.61,3026.21 ; C42.2@4404.03,3090.25 cw(c4395.89,3082.11) 4407.4,3082.11 ; C42.2@4407.4,3089.69 Q1.3@4407.4,3020 v1(4465,3020) 4465,3055 4655,3245 5010,3245 5062.72,3192.28 R22.1@5062.72,3120 ; Q1.3@4417.55,3013.79 cw(c4432.53,2998.8) 4432.53,3020 cw(c4432.53,3041.2) Q1.3@4417.55,3026.21 ; v1(4555,2975) 4602.28,3022.28 R21.1@4605,3022.28 U13.8@4657.2,3022.28 ; R21.1@4595.29,3015.29 ccw(c4588.3,3022.28) R21.1@4598.19,3022.28
  Bottom Layer w10: v1@4465,3011.5 cw(c4465,2990.98) 4479.51,3005.49 cw(c4494.02,3020) v1@4473.5,3020 ; v1(4465,3020) 4510,2975 v1(4555,2975) ; v1@4548.99,2968.99 ccw(c4534.48,2954.48) 4534.48,2975 ccw(c4534.48,2995.52) v1@4548.99,2981.01
VREF: C5.1 C9.1 C14.1 C15.1 C16.1 C18.1 U2.2 U3.1 U4.3 U4.5 U5.2 U5.6 | length 2321.5
  Top Layer w10: v1@4018.99,2368.99 cw(c4004.48,2354.48) 4025,2354.48 cw(c4045.52,2354.48) v1@4031.01,2368.99 ; v1@4023.84,2375.95 cw(c4048.36,2355.97) 4048.36,2387.6 ; C9.1@4025,2332.72 v1(4025,2375) 4037.6,2387.6 ; v1@4025.89,2383.45 ccw(c4027.4,2397.79) 4037.6,2387.6 ; v1@4031.59,2369.63 cw(c4069.41,2338.82) U3.1@4069.41,2387.6 4037.6,2387.6 ; v1@4033.45,2375.89 cw(c4047.79,2377.4) 4037.6,2387.6 ; U4.3@4145.07,2675.34 cw(c4138.48,2668.76) 4147.8,2668.76 cw(c4157.11,2668.76) U4.3@4150.52,2675.34 ; U4.3@4145.07,2716.23 ccw(c4138.48,2722.82) 4147.8,2722.82 ccw(c4157.11,2722.82) U4.3@4150.52,2716.23 ; C14.1@4162.28,2625 4147.8,2639.49 U4.3@4147.8,2695.79 4147.8,2727.8 4175,2755 U4.5@4175,2792.6 ; U4.5@4170.66,2773.77 cw(c4160.17,2763.28) 4175,2763.28 ; U4.5@4170.66,2814.66 ccw(c4164.07,2821.24) 4173.39,2821.24 ccw(c4182.7,2821.24) U4.5@4176.11,2814.66 ; U4.5@4173.39,2794.21 4173.39,2848.39 v1(4175,2850) ; v1(4370,2400) 4380,2410 ; v1@4372.49,2408.13 ccw(c4374.69,2415.31) 4380,2410 ; v1@4378.13,2402.49 cw(c4385.31,2404.69) 4380,2410 ; v1(4430,2730) U5.2@4430,2655.47 4430,2565 4380,2515 U5.6@4380,2464.53 4380,2410
  Bottom Layer w10: v1@4018.99,2368.99 cw(c4004.48,2354.48) 4025,2354.48 cw(c4045.52,2354.48) 4031.01,2368.99 cw(c4045.52,2354.48) 4045.52,2375 cw(c4045.52,2395.52) v1@4031.01,2381.01 ; 4046.09,2081.63 ccw(c4057.72,2093.25) C5.1@4057.72,2076.81 ; C5.1@4057.72,2063.19 cw(c4057.72,2046.75) 4069.34,2058.37 ; U2.2@4100.07,2042.59 ccw(c4088.44,2030.96) 4088.44,2047.4 ccw(c4088.44,2063.84) U2.2@4100.07,2052.22 ; U2.2@4122.6,2047.4 4080.32,2047.4 C5.1@4057.72,2070 4025,2102.72 v1(4025,2375) 4307.72,2375 C18.1@4332.72,2400 ; v1@4175,2841.5 cw(c4175,2820.98) 4189.51,2835.49 cw(c4204.02,2850) v1@4183.5,2850 ; v1@4181.01,2843.99 cw(c4195.52,2829.48) 4195.52,2850 cw(c4195.52,2870.52) v1@4181.01,2856.01 ; C15.1@4207.28,2850 v1(4175,2850) 4295,2730 v1(4430,2730) C16.1@4430,2777.72 ; 4321.09,2388.37 cw(c4332.72,2376.75) C18.1@4332.72,2393.19 ; C18.1@4335,2400 v1(4370,2400) ; v1@4363.99,2393.99 ccw(c4349.48,2379.48) 4349.48,2400 ccw(c4349.48,2420.52) v1@4363.99,2406.01 ; v1@4423.99,2723.99 ccw(c4409.48,2709.48) 4409.48,2730 ccw(c4409.48,2750.52) 4423.99,2736.01 ccw(c4409.48,2750.52) 4430,2750.52 ccw(c4450.52,2750.52) v1@4436.01,2736.01 ; C16.1@4425.68,2774.03 cw(c4415.27,2763.61) 4430,2763.61
VUSB: C39.1 C41.1 FB1.1 U16.19 | length 299.7
  Top Layer w10: C41.1@4652.72,1955 v1(4715,1955) 4689.53,1929.53 C39.1@4689.53,1900 ; C39.1@4686.1,1888.7 cw(c4676.7,1879.29) 4690,1879.29 ; C39.1@4686.1,1911.3 ccw(c4677.84,1919.56) 4689.53,1919.56 ccw(c4701.22,1919.56) C39.1@4692.95,1911.3 ; FB1.1@4690,1852.72 C39.1@4690,1899.53 ; 4690,1881.58 cw(c4700.08,1881.58) C39.1@4692.95,1888.7
  Bottom Layer w10: v1@4715.47,1955.47 U16.19@4771.57,1955.47 ; v1@4721.01,1948.99 cw(c4736.66,1933.34) 4736.66,1955.47 ; v1@4721.01,1961.01 ccw(c4734.38,1974.38) 4734.38,1955.47
pads on no net: ANT1. B1.6 BC1.3 BC1.4 J1.4 J1.6 U1.4 U6.1 U9.3 U9.4 U9.7 U12.2 U12.3 U12.4 U12.9 U12.19 U12.20 U12.21 U12.22 U12.23 U12.25 U12.26 U12.29 U12.30 U12.31 U12.44 U12.45 U14.4 U14.5 U14.7 U14.10 U14.15 U14.19 U15.4 U16.3 U16.5 U16.6 U16.7 U16.8 U16.9 U16.10 U16.11 U16.12 U16.13 U16.18 U16.21 U16.22 U16.23 U16.25 U16.27 U16.28 U16.29 X1.2 X1.4 Y1.4 Y1.7

## Polygon pours and split planes (outlines as drawn)
GND on Top Layer "Top Layer-GND" (solid, shelved, pour order 4): 3879,1477 5879,1477 5879,3333 3879,3333
GND on Bottom Layer "Bot Layer-GND" (solid, shelved, pour order 5): 3879,1477 5879,1477 5879,3333 3879,3333

## Keep-outs
Keep-Out Layer:
  the board outline again, w19.68

## Other copper
Top Layer:
  pour cut-out: 5468.24,1936.3 5894,1936.3 5894,2548 5468.24,2548
Bottom Layer:
  pour cut-out: 5468.24,1936.3 5894,1936.3 5894,2548 5468.24,2548

## Silkscreen, mask and mechanical layers (free items; w line width, h text height)
Top Overlay:
  text "VCC3.3" at 4232,3142 h30
  text "GND" at 3903,3137 h30
  text "FLASH_CS" at 5115,3112 h30
  text "MOSI" at 4588,2921 h30
  text "RDYN" at 5058,2919 h30
  text "SCK" at 4883,2918 h30
  text "REQN" at 4685,2757 h30
  text "MISO" at 4929,2757 h30
  text "SDA" at 4369,1759 h30
  text "SCL" at 4503,1759 h30
  text "VBAT" at 5673,1511 h30
  text "VBUS" at 5118,1491 h30